# Altium PCB PCBheltec.PcbDoc
Units mil, origin at the board's own origin, x right, y up, seen from the top; angles counter-clockwise.
Board outline 2110 x 2005 mil, 2 copper layers (Top Layer, Bottom Layer); 10 components, 43 nets, 89 pads, 16 vias.
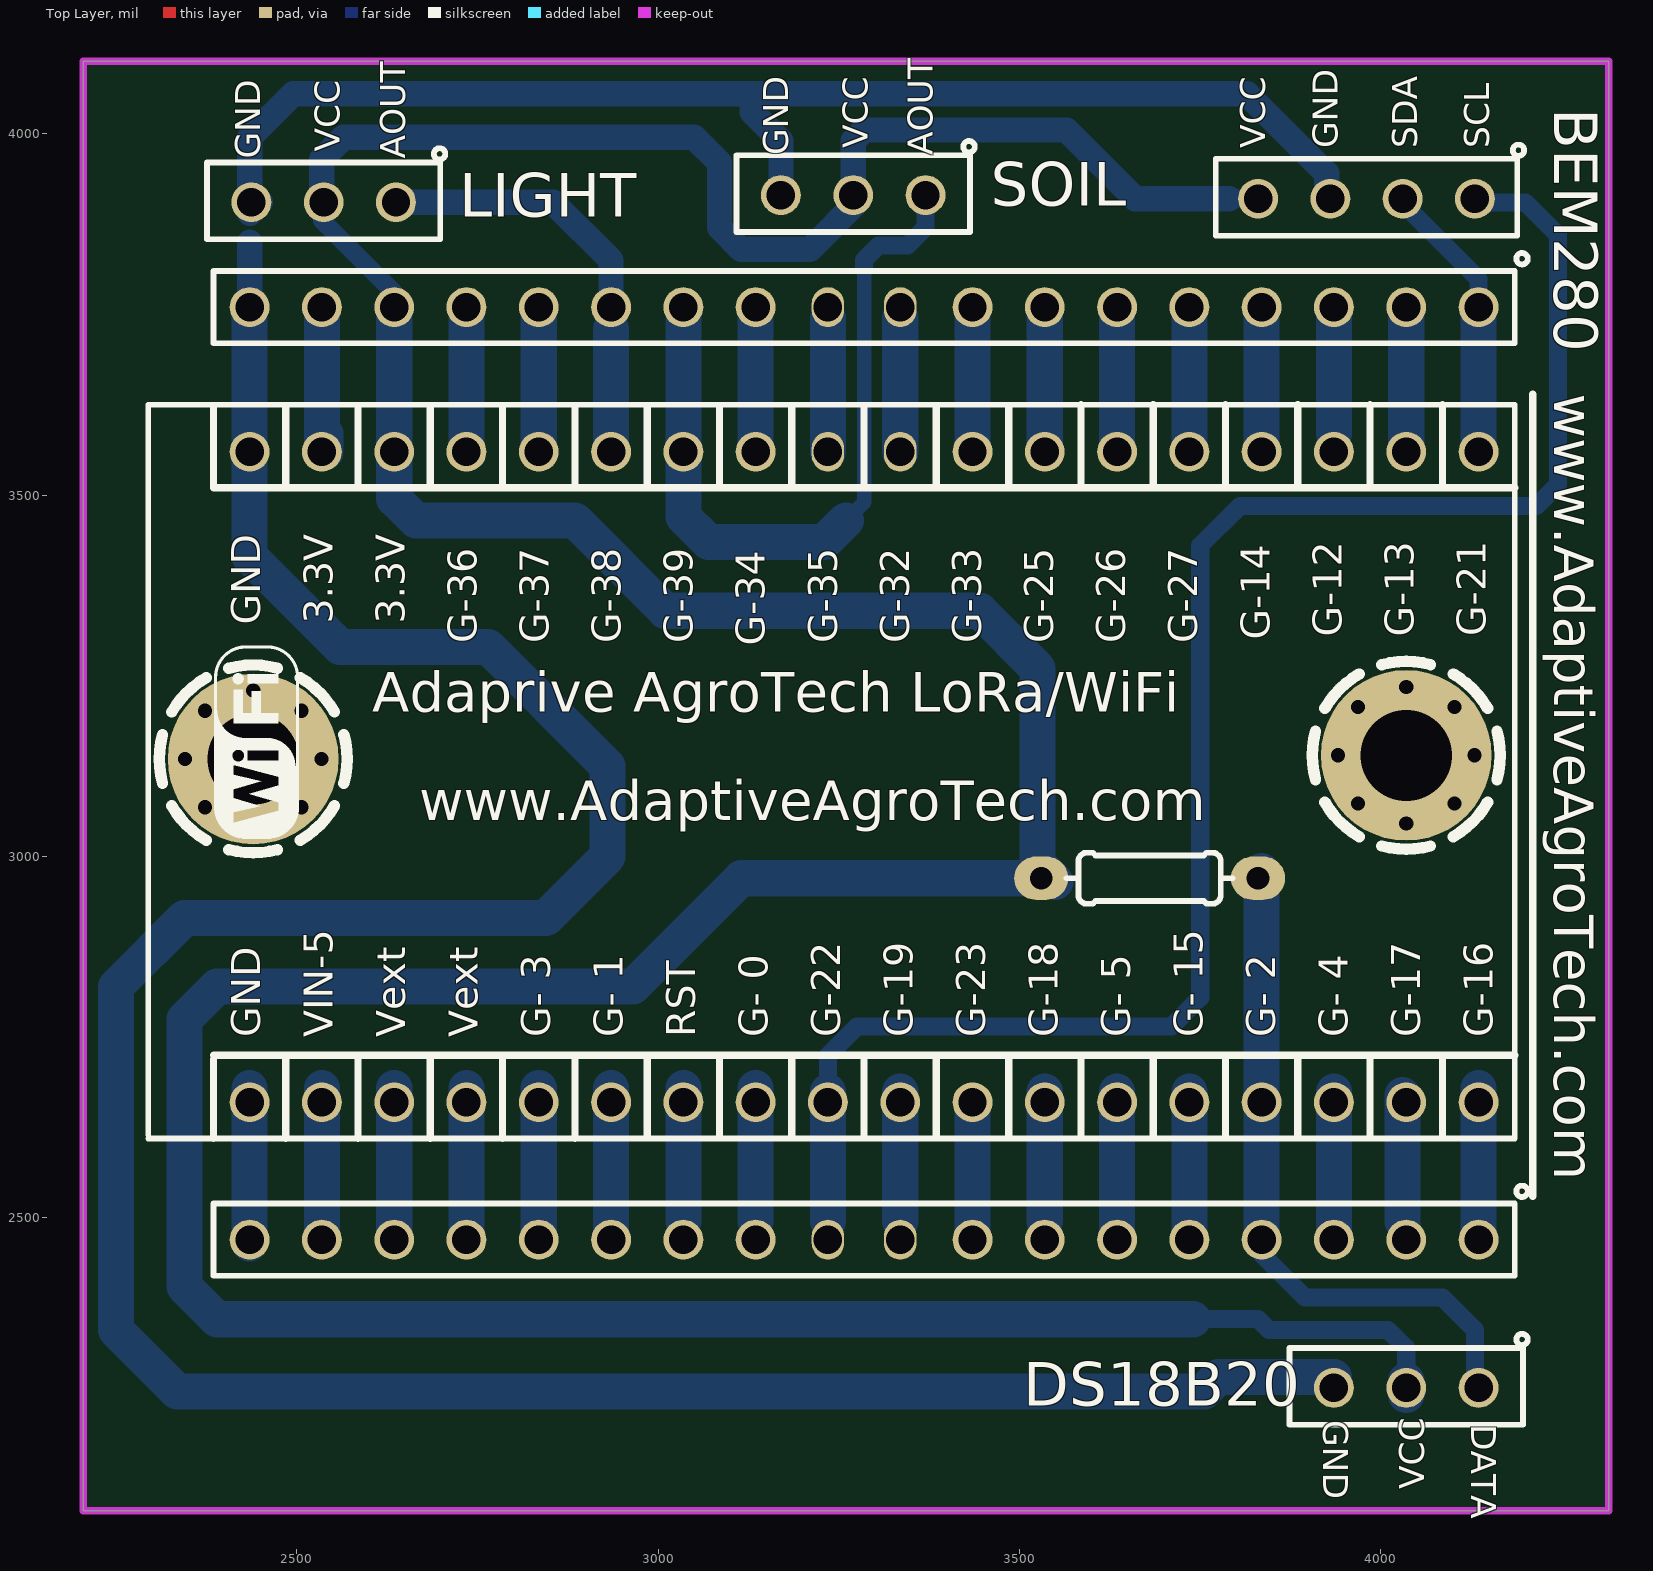
[diagram p0: Top Layer view]
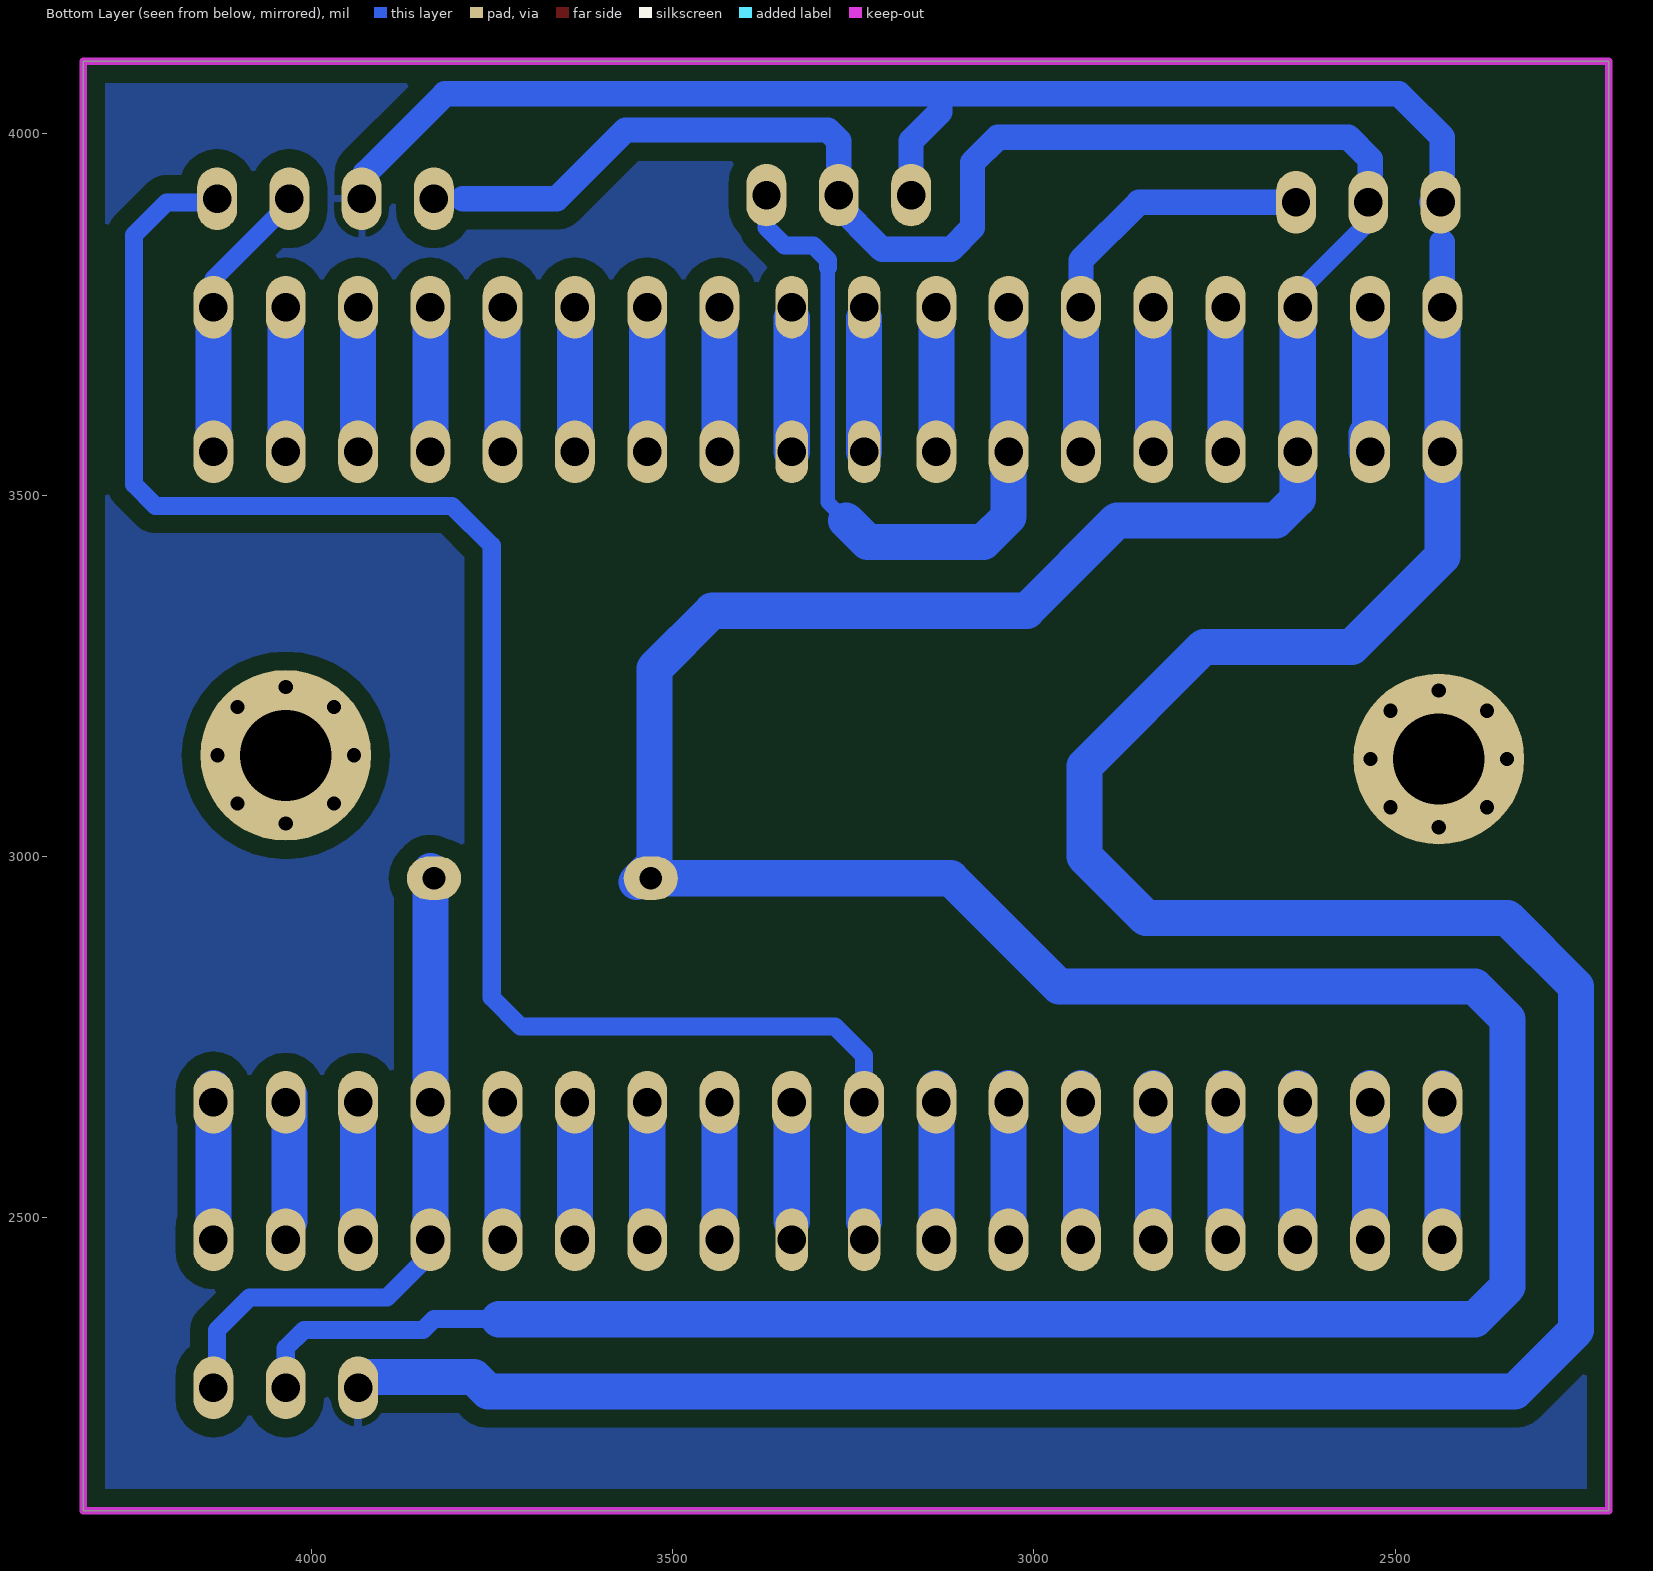
[diagram p1: Bottom Layer view, seen from below]

## Layer stack, top to bottom
Top Solder: solder mask 0.4, Solder Resist, Dk 3.5
Top Layer: signal copper 1.4
Dielectric 1: dielectric 12.6, FR-4, Dk 4.8
Bottom Layer: signal copper 1.4
Bottom Solder: solder mask 0.4, Solder Resist, Dk 3.5

## Board outline
2205,2095 2205,4100 4315,4100 4315,2095

## Design rules (kind name [scope] priority, off if disabled: settings)
Clearance [All] p1: gap=25 ignorepadtopadclearanceinfootprint=FALSE
PolygonConnect [All] p1: connectstyle=Relief reliefconductorwidth=10 reliefentries=4 polygonreliefangle="90 Angle" airgapwidth=10
RoutingVias [All] p1: holewidth=28 width=50 viastyle="Through Hole" minholewidth=28 minwidth=50 maxholewidth=28 maxwidth=50
SolderMaskExpansion [All] p1: expansion=4
Width [All] p1: maxlimit=90 minlimit=10 preferedwidth=50
30 further rules are at their usual default settings.

## Components (designator, comment, footprint, x,y, rotation, side; value= is the part's Value field where it differs from the comment)
? "Comment" SCMH_M3 2440,3135 r0 top
? "Comment" HDR_F_1X3 4035,2265 r180 top
? "Comment" HDR_F_1X18 3285,2470 r180 top
? "Comment" HDR_F_1X3 3270,3915 r180 top
? "Comment" HDR_F_1X4 3980,3910 r180 top
? "Comment" HDR_F_1X3 2537.5,3905 r180 top
? "Comment" HDR_F_1X18 3285,3760 r180 top
? "Comment" SCMH_M3 4035,3140 r0 top
? "Comment" R0125W_AX03 3680,2970 r0 top
? "Comment" ESP32_36_HELTEC 3080,3065 r90 top

## Footprints (in the part's own frame and the unit in brackets; to place one, negate y for a bottom-side part, rotate by r counter-clockwise, add the part's x,y. Pads: shape width x height; smd on the part's side, far side on the other; paste and mask are expansions set on the pad)
ESP32_36_HELTEC [mm]
  round 1.4 / inner round 1.4 / far side oval 2.2x1.4 hole 1: 1(-10.287,-26.797) 1(12.573,-26.797) 2(-10.287,-24.257) 2(12.573,-24.257) 3(-10.287,-21.717) 3(12.573,-21.717) 4(-10.287,-19.177) 4(12.573,-19.177) 5(-10.287,-16.637) 5(12.573,-16.637) 6(-10.287,-14.097) 6(12.573,-14.097) 7(-10.287,-11.557) 7(12.573,-11.557) 8(-10.287,-9.017) 8(12.573,-9.017) 9(-10.287,-6.477) 10(-10.287,-3.937) 11(-10.287,-1.397) 11(12.573,-1.397) 12(-10.287,1.143) 12(12.573,1.143) 13(-10.287,3.683) 13(12.573,3.683) 14(-10.287,6.223) 14(12.573,6.223) 15(-10.287,8.763) 15(12.573,8.763) 16(-10.287,11.303) 16(12.573,11.303) 17(-10.287,13.843) 17(12.573,13.843) 18(-10.287,16.383) 18(12.573,16.383)
  oval 1.4x1.143 / inner oval 1.4x1.143 / far side oval 2.2x1.143 hole 1: 9(12.573,-6.477) 10(12.573,-3.937)
  silkscreen extent -11.56,-28.07 14.22,19.94, body extent -11.89,-32.13 13.46,20.32, height 15.43
HDR_F_1X3 [mm] "HEADER FEMALE pitch: 2.54mm"
  round 1.4 / inner round 1.4 / far side oval 1.4x2.2 hole 1 mask+0.1: 1(-2.54,0) 2(0,0) 3(2.54,0)
  silkscreen extent -4.27,-1.9 4.1,1.3, body extent -3.93,-1.3 3.94,1.2, height 8.5
HDR_F_1X4 [mm] "HEADER FEMALE pitch: 2.54mm"
  round 1.4 / inner round 1.4 / far side oval 1.4x2.2 hole 1 mask+0.1: 1(-3.81,0) 2(-1.27,0) 3(1.27,0) 4(3.81,0)
  silkscreen extent -5.54,-1.9 5.3,1.3, body extent -5.2,-1.3 5.21,1.2, height 8.5
HDR_F_1X18 [mm] "Connector; Header; 18 Position"
  round 1.4 / inner round 1.4 / far side oval 1.4x2.2 hole 1: 1(-21.59,0) 2(-19.05,0) 3(-16.51,0) 4(-13.97,0) 5(-11.43,0) 6(-8.89,0) 7(-6.35,0) 8(-3.81,0) 11(3.81,0) 12(6.35,0) 13(8.89,0) 14(11.43,0) 15(13.97,0) 16(16.51,0) 17(19.05,0) 18(21.59,0)
  oval 1.143x1.4 / inner oval 1.143x1.4 / far side oval 1.143x2.2 hole 1: 9(-1.27,0) 10(1.27,0)
  silkscreen extent -23.32,-1.9 22.86,1.27, body extent -22.86,-1.27 22.86,1.27, height 8.5
R0125W_AX03 [mil] "RESISTOR 1/8 WATT, AXIAL0.3 INCH SPACING"
  oval 75x60 hole 31.5: 1(-150,0) 2(150,0)
  silkscreen extent -115,-35 115,35, body extent -164,-33 164,33, height 73
SCMH_M3 [mm] "SCREW mouting, M3, 3.0mm diameter and 6.0mm PanHead"
  round 6 / inner round 3.5 / far side round 6 hole 3.2 mask+0.1: 1(0,0)
  Top Layer pour cut-out: 0,3.5 -1.339,3.234 -2.475,2.475 -3.234,1.339 -3.5,0 -3.5,0 -3.234,-1.339 -2.475,-2.475 -1.339,-3.234 0,-3.5 0,-3.5 1.75,-3.031 3.031,-1.75 3.5,0 3.5,0 3.234,1.339 2.475,2.475 1.339,3.234 0,3.5
  Bottom Layer pour cut-out: 0,3.5 -1.339,3.234 -2.475,2.475 -3.234,1.339 -3.5,0 -3.5,0 -3.234,-1.339 -2.475,-2.475 -1.339,-3.234 0,-3.5 0,-3.5 1.75,-3.031 3.031,-1.75 3.5,0 3.5,0 3.234,1.339 2.475,2.475 1.339,3.234 0,3.5
  silkscreen extent -3.3,-3.3 3.3,3.3

## Via types
v1: diameter 31.5, hole 19.68, Top Layer to Bottom Layer, 16 vias

## Nets (pads, with @x,y where several pads share a name; then routed paths per layer and width w, separated by ;. In a path a pad name is that pad's centre, name@x,y a point inside that pad or via, vN(x,y) a via of type N, cw(c..) or ccw(c..) an arc to the next point about the centre after c; other vN are vias at no path point)
NewNet1: ?.1@4035,3140
  other v1: 4035,3045.51 3968.19,3073.19 4101.81,3073.19 3940.51,3140 4129.49,3140 3968.19,3206.81 4101.81,3206.81 4035,3234.49
NewNet2: ?.1@2440,3135
  other v1: 2440,3040.51 2373.19,3068.19 2506.81,3068.19 2345.51,3135 2534.49,3135 2373.19,3201.81 2506.81,3201.81 2440,3229.49
NewNet3: 
NewNet4: 
NewNet5: 
NewNet6: ?.17@2535,2470 ?.17@2535,2660 | length 210
  Bottom Layer w50: ?.17@2535,2470 2535,2660 ?.17@2535,2680
NewNet7: ?.13@2935,2470 ?.13@2935,2660 | length 210
  Bottom Layer w50: ?.13@2935,2470 2935,2660 ?.13@2935,2680
NewNet8: ?.1@4135,2470 ?.1@4135,2660 | length 195
  Bottom Layer w50: ?.1@4135,2485 4135,2660 ?.1@4135,2680
NewNet9: ?.12@3035,2470 ?.12@3035,2660 | length 185
  Bottom Layer w50: ?.12@3035,2495 3035,2660 ?.12@3035,2680
NewNet10: ?.11@3135,2470 ?.11@3135,2660 | length 185
  Bottom Layer w50: ?.11@3135,2495 3135,2660 ?.11@3135,2680
NewNet11: ?.1@4130,3910 ?.10@3235,2470 ?.10@3235,2660 | length 2412
  Bottom Layer w25: ?.10@3235,2660 3235,2725 3275,2765 3710,2765 3750,2805 3750,3430 3805,3485 4215,3485 4245,3515 4245,3860.06 4200.06,3905 ?.1@4145,3905
  Bottom Layer w50: ?.10@3235,2495 3235,2660 ?.10@3235,2675
NewNet12: ?.6@3635,2470 ?.6@3635,2660 | length 190
  Bottom Layer w50: ?.6@3635,2485 3635,2660 ?.6@3635,2675
NewNet13: ?.3@3935,2470 ?.3@3935,2660 | length 190
  Bottom Layer w50: ?.3@3935,2485 3935,2660 ?.3@3935,2675
NewNet14: ?.8@3435,2470 ?.8@3435,2660 | length 175
  Bottom Layer w50: ?.8@3435,2485 ?.8@3435,2660
NewNet15: ?.9@3335,2470 ?.9@3335,2660 | length 180
  Bottom Layer w50: ?.9@3335,2495 3335,2660 ?.9@3335,2675
NewNet16: ?.1@4135,2265 ?.2@3830,2970 ?.4@3835,2470 ?.4@3835,2660 | length 910.6
  Bottom Layer w25: ?.4@3835,2455 3835,2450 3895,2390 4085,2390 4130,2345 4130,2280 ?.1@4135,2275
  Bottom Layer w50: ?.4@3835,2485 3835,2660 ?.2@3835,2980
NewNet17: ?.16@2635,2470 ?.16@2635,2660 | length 210
  Bottom Layer w50: ?.16@2635,2470 2635,2660 ?.16@2635,2680
NewNet18: ?.5@3735,2470 ?.5@3735,2660 | length 190
  Bottom Layer w50: ?.5@3735,2485 3735,2660 ?.5@3735,2675
NewNet19: ?.17@2535,3560 ?.17@2535,3760 | length 220
  Bottom Layer w50: ?.17@2535,3565 ?.17@2535,3760 ; ?.17@2540,3560 ?.17@2540,3585
NewNet20: ?.15@2735,3560 ?.15@2735,3760 | length 180
  Bottom Layer w50: ?.15@2735,3565 2735,3585 ?.15@2735,3745
NewNet21: ?.1@2637.5,3905 ?.13@2935,3560 ?.13@2935,3760 | length 590.6
  Bottom Layer w35: ?.1@2637.5,3905 2855,3905 2935,3825 2935,3760 ?.13@2935,3730
  Bottom Layer w50: ?.13@2935,3565 ?.13@2935,3730
NewNet22: ?.1@3370,3915 ?.12@3035,3560 ?.12@3035,3760 | length 1040.9
  Bottom Layer w20: 3260,3465 3285,3490 3285,3815
  Bottom Layer w25: 3285,3815 3285,3825 3305,3845 3345,3845 3370,3870 ?.1@3370,3915
  Bottom Layer w50: ?.12@3035,3560 3035,3470 3070,3435 3230,3435 3260,3465 ; ?.12@3035,3565 ?.12@3035,3745
NewNet23: ?.11@3135,3560 ?.11@3135,3760 | length 180
  Bottom Layer w50: ?.11@3135,3565 3135,3585 ?.11@3135,3745
NewNet24: ?.10@3235,3560 ?.10@3235,3760 | length 185
  Bottom Layer w50: ?.10@3235,3560 3235,3585 ?.10@3235,3745
NewNet25: ?.4@3835,3560 ?.4@3835,3760 | length 185
  Bottom Layer w50: ?.4@3835,3560 3835,3585 ?.4@3835,3745
NewNet26: ?.1@4135,3560 ?.1@4135,3760 ?.2@4030,3910 | length 388.5
  Bottom Layer w25: ?.2@4030,3925 4030,3904.19 4135,3799.19 ?.1@4135,3760
  Bottom Layer w50: ?.1@4135,3565 ?.1@4135,3745
NewNet27: ?.2@4035,3560 ?.2@4035,3760 | length 180
  Bottom Layer w50: ?.2@4035,3565 4035,3585 ?.2@4035,3745
NewNet28: ?.3@3935,3560 ?.3@3935,3760 | length 160
  Bottom Layer w50: ?.3@3935,3585 ?.3@3935,3745
NewNet29: ?.5@3735,3560 ?.5@3735,3760 | length 185
  Bottom Layer w50: ?.5@3735,3560 3735,3585 ?.5@3735,3745
NewNet30: ?.6@3635,3560 ?.6@3635,3760 | length 185
  Bottom Layer w50: ?.6@3635,3560 3635,3585 ?.6@3635,3745
NewNet31: ?.7@3535,3560 ?.7@3535,3760 | length 185
  Bottom Layer w50: ?.7@3535,3560 3535,3585 ?.7@3535,3745
NewNet32: ?.8@3435,3560 ?.8@3435,3760 | length 185
  Bottom Layer w50: ?.8@3435,3560 3435,3585 ?.8@3435,3745
NewNet33: ?.9@3335,3560 ?.9@3335,3760 | length 185
  Bottom Layer w50: ?.9@3335,3560 3335,3585 ?.9@3335,3745
NewNet34: ?.14@2835,3560 ?.14@2835,3760 | length 180
  Bottom Layer w50: ?.14@2835,3565 2835,3585 ?.14@2835,3745
NewNet35: ?.1@3530,2970 ?.2@2537.5,3905 ?.2@3270,3915 ?.2@4035,2265 ?.4@3830,3910 ?.16@2635,3560 ?.16@2635,3760 | length 6795.5
  Bottom Layer w25: ?.2@2535,3925 2535,3880 2635,3780 ?.16@2635,3760 ; 3740,2360 3830,2360 3845,2345 4010,2345 4035,2320 ?.2@4035,2275 ; 3790,3910 ?.4@3830,3910
  Bottom Layer w35: ?.2@2535,3925 2535,3965 2565,3995 3050,3995 3085,3960 3085,3870 3115,3840 3210,3840 ?.2@3277.5,3907.5 ; ?.2@3270,3915 3270,3990 3285,4005 3565,4005 3660,3910 3790,3910
  Bottom Layer w50: ?.16@2635,3745 2635,3560 2635,3495 2665,3465 2885,3465 3010,3340 3445,3340 3525,3260 3525,2990 ?.1@3550,2965 ; ?.1@3530,2970 3115,2970 2965,2820 2390,2820 2345,2775 2345,2405 2390,2360 3740,2360 ; ?.2@4035,2255 4035,2265 ?.2@4035,2275
NewNet36: 
NewNet37: ?.7@3535,2470 ?.7@3535,2660 | length 180
  Bottom Layer w50: ?.7@3535,2495 3535,2660 ?.7@3535,2675
NewNet38: ?.14@2835,2470 ?.14@2835,2660 | length 210
  Bottom Layer w50: ?.14@2835,2470 2835,2660 ?.14@2835,2680
NewNet39: ?.15@2735,2470 ?.15@2735,2660 | length 210
  Bottom Layer w50: ?.15@2735,2470 2735,2660 ?.15@2735,2680
NewNet40: ?.2@4035,2470 ?.2@4035,2660 | length 175
  Bottom Layer w50: ?.2@4030,2495 ?.2@4030,2670
NewNet41: ?.18@2435,2470 ?.18@2435,2660 | length 215
  Bottom Layer w50: ?.18@2435,2465 2435,2660 ?.18@2435,2680
NewNet42: 
NewNet43: ?.3@2437.5,3905 ?.3@3170,3915 ?.3@3930,3910 ?.3@3935,2265 ?.18@2435,3560 ?.18@2435,3760 | length 5986.1
  Bottom Layer w35: ?.3@2433.75,3901.25 ?.3@2435,3902.5 ; ?.18@2435,3760 2435,3850 ; ?.3@2435,3890 ?.3@2435,3902.5 ; ?.3@2442.5,3912.5 ?.3@2435,3905 ; ?.3@2450,3905 ?.3@2437.5,3905 ; ?.3@3170,3915 3170,3990 3130,4030 3130,4055 ; ?.3@3925,3925 3925,3945 3815,4055 3130,4055 ; ?.3@2435,3902.5 ?.3@2435,3905 ; ?.3@2435,3902.5 ?.3@2437.5,3905 ; ?.3@2435,3905 2435,3995 2495,4055 3130,4055 ; ?.3@2435,3905 ?.3@2437.5,3905
  Bottom Layer w50: ?.18@2435,3560 2435,3415 2560,3290 2765,3290 2930,3125 2930,3000 2845,2915 2345,2915 2250,2820 2250,2345 2335,2260 3755,2260 3775,2280 ?.3@3935,2280 ; ?.18@2435,3565 ?.18@2435,3745

## Polygon pours and split planes (outlines as drawn)
NewNet43 on Bottom Layer (solid, remove dead copper, pour order 0): 2205,4100 4315,4100 4315,2095 2205,2095

## Keep-outs
Keep-Out Layer:
  the board outline again, w10

## Silkscreen, mask and mechanical layers (free items; w line width, h text height)
Top Overlay:
  lines w10: 4210,2530 4210,3640
  text "BEM280" at 4240,4035 h60 r270
  text "VCC" at 3290,3980 h35 r90
  text "VCC" at 3840,3980 h35 r90
  text "GND" at 3940,3980 h35 r90
  text "SDA" at 4050,3980 h35 r90
  text "SCL" at 4150,3980 h35 r90
  text "VCC" at 2560,3975 h35 r90
  text "GND" at 3180,3970 h35 r90
  text "AOUT" at 3380,3970 h35 r90
  text "GND" at 2450,3965 h35 r90
  text "AOUT" at 2650,3965 h35 r90
  text "SOIL" at 3460,3900 h60
  text "LIGHT" at 2725,3885 h60
  text "www.AdaptiveAgroTech.com" at 4240,3640 h55 r270
  text "Adaprive AgroTech LoRa/WiFi" at 2605,3200 h55
  text "www.AdaptiveAgroTech.com" at 2670,3050 h55
  text "DS18B20" at 3505,2240 h60
  text "GND" at 3920,2220 h35 r270
  text "DATA" at 4125,2215 h35 r270
  text "VCC" at 4060,2125 h35 r90

## Text inside footprints (layer, text, board x,y; h text height)
?: Top Overlay "G-38" at 2948.53,3295.24 h40 r90; Top Overlay "3.3V" at 2649.41,3321.9 h40 r90; Top Overlay "GND" at 2450,3320.38 h40 r90; Top Overlay "RST" at 3051.76,2750 h40 r90; Top Overlay "Vext" at 2750.88,2750 h40 r90; Top Overlay "Vext" at 2650.59,2750 h40 r90; Top Overlay "VIN-5" at 2550.29,2750 h40 r90; Top Overlay "GND" at 2450,2750 h40 r90; Top Overlay "G-39" at 3048.24,3295.24 h40 r90; Top Overlay "G-34" at 3147.94,3291.43 h40 r90; Top Overlay "G-35" at 3247.65,3295.24 h40 r90; Top Overlay "G-32" at 3347.35,3295.24 h40 r90; Top Overlay "G-25" at 3546.77,3295.24 h40 r90; Top Overlay "G-26" at 3646.47,3295.24 h40 r90; Top Overlay "G-27" at 3746.18,3295.24 h40 r90; Top Overlay "G-14" at 3845.88,3300 h40 r90; Top Overlay "G-12" at 3945.59,3303.81 h40 r90; Top Overlay "G-13" at 4045.29,3303.81 h40 r90; Top Overlay "G-36" at 2749.12,3295.24 h40 r90; Top Overlay "3.3V" at 2549.71,3321.9 h40 r90; Top Overlay "G-33" at 3447.06,3295.24 h40 r90; Top Overlay "G-23" at 3452.94,2750 h40 r90; Top Overlay "G-22" at 3252.35,2750 h40 r90; Top Overlay "G- 1" at 2951.47,2750 h40 r90; Top Overlay "G- 3" at 2851.18,2750 h40 r90; Top Overlay "G-21" at 4145,3304.76 h40 r90; Top Overlay "G-19" at 3352.65,2750 h40 r90; Top Overlay "G-18" at 3553.24,2750 h40 r90; Top Overlay "G- 5" at 3653.53,2750 h40 r90; Top Overlay "G-17" at 4054.71,2750 h40 r90; Top Overlay "G-16" at 4155,2750 h40 r90; Top Overlay "G- 4" at 3954.41,2750 h40 r90; Top Overlay "G- 2" at 3854.12,2750 h40 r90; Top Overlay "G- 15" at 3753.82,2750 h40 r90; Top Overlay "G- 0" at 3152.06,2750 h40 r90; Top Overlay "G-37" at 2848.82,3295.24 h40 r90